# Altium PCB GuitarPedal.PcbDoc
Units mm, origin at the board's own origin, x right, y up, seen from the top; angles counter-clockwise.
Board outline 100 x 160 mm, 2 copper layers (Top Layer, Bottom Layer), stack 1.671 mm thick; 45 components, 38 nets, 193 pads, 5 vias.
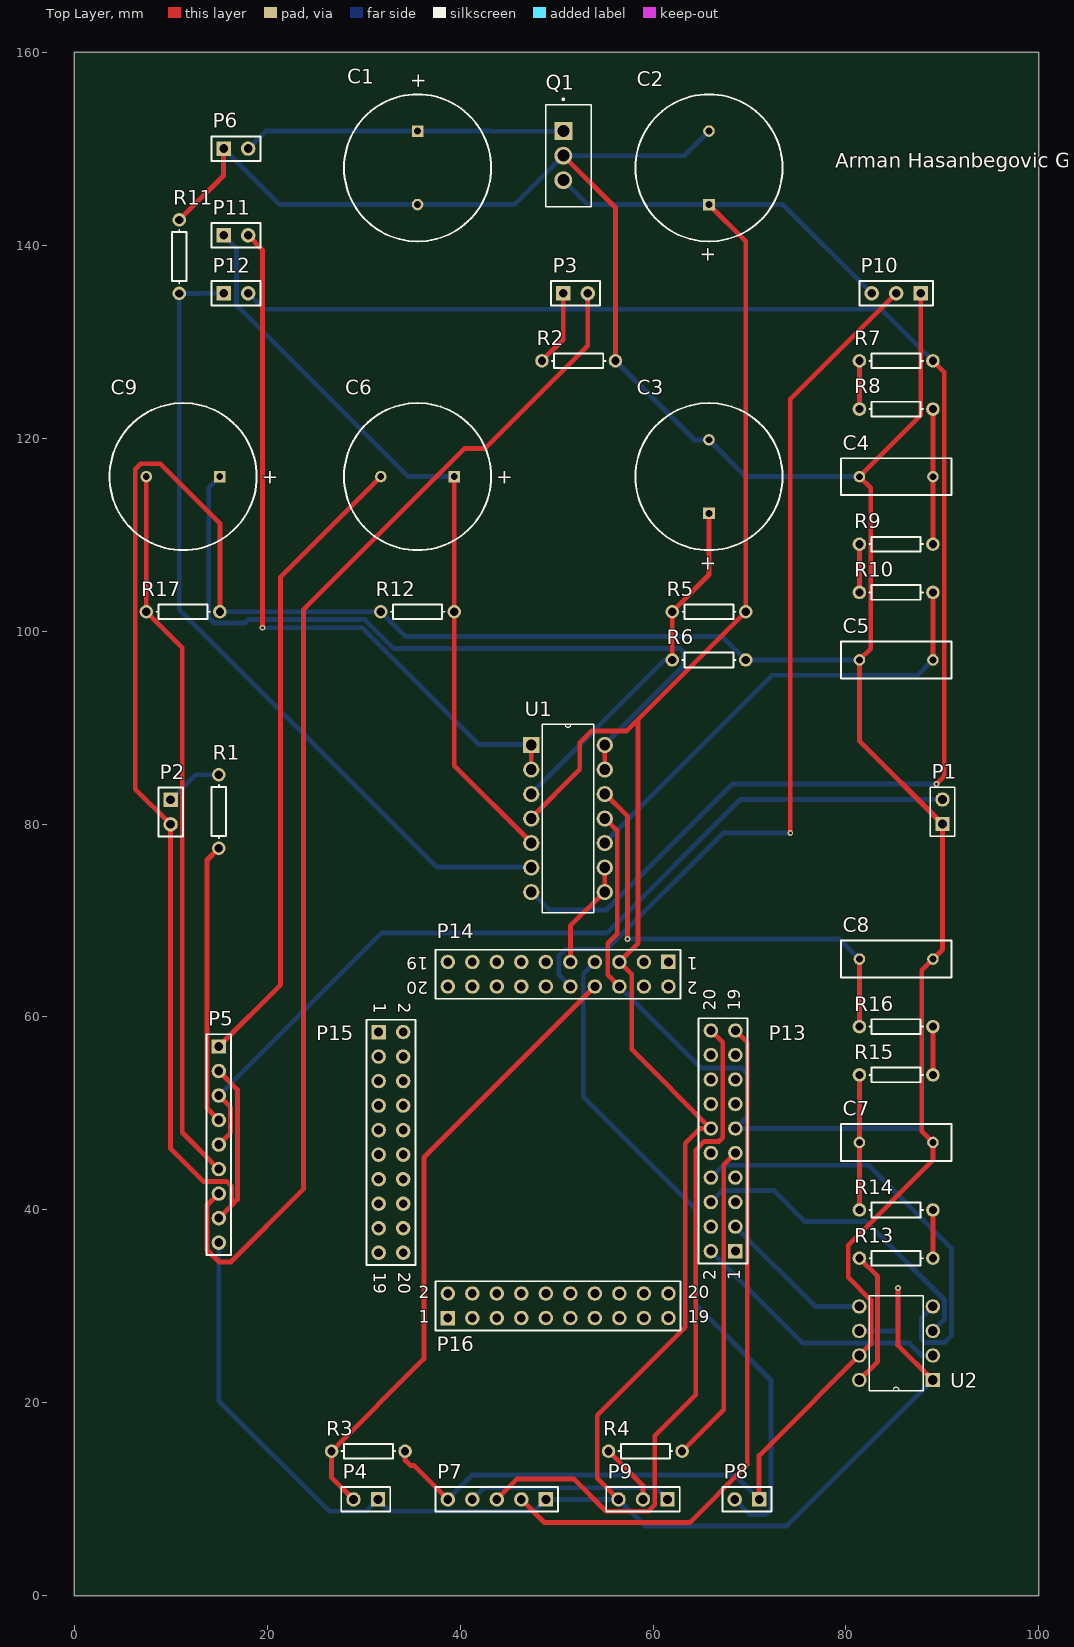
[diagram p0: Top Layer view]
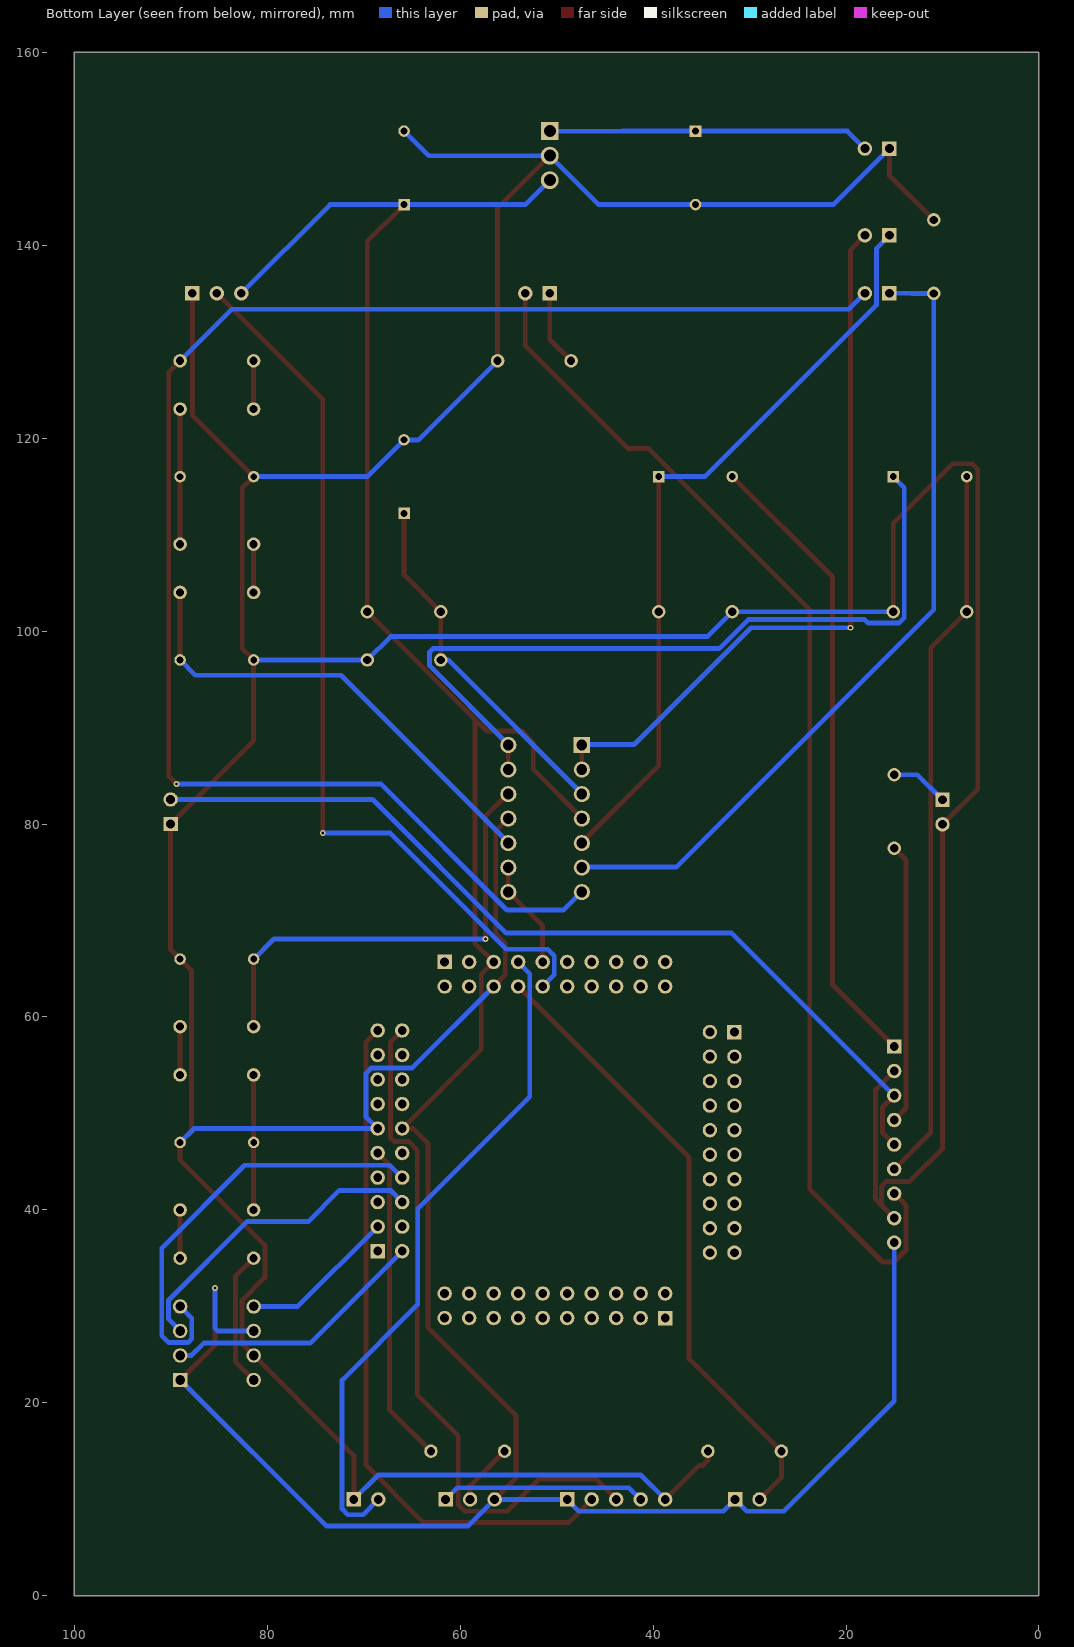
[diagram p1: Bottom Layer view, seen from below]

## Layer stack, top to bottom
Top Solder: solder mask 0.0102, Solder Resist, Dk 3.5
Top Layer: signal copper 0.0356
Dielectric 1: dielectric 1.6, FR-4, Dk 4.8
Bottom Layer: signal copper 0.0356
Bottom Solder: solder mask 0.0102, Solder Resist, Dk 3.5

## Board outline
0,0 100,0 100,160 0,160

## Design rules (kind name [scope] priority, off if disabled: settings)
Clearance [All] p1: gap=0.2 ignorepadtopadclearanceinfootprint=TRUE
PolygonConnect [All] p1: connectstyle=Relief reliefconductorwidth=0.254 reliefentries=4 polygonreliefangle="90 Angle" airgapwidth=0.254
RoutingVias [All] p1: holewidth=0.3 width=0.6 viastyle="Through Hole" minholewidth=0.3 minwidth=0.6 maxholewidth=0.3 maxwidth=0.6
SilkToSolderMaskClearance [IsPad] p1: minsilkscreentomaskgap=0.1 clearancetoexposedcopper=TRUE
SolderMaskExpansion [All] p1: expansion=0.102
Width [All] p1: maxlimit=1 minlimit=0.3 preferedwidth=0.5
29 further rules are at their usual default settings.

## Components (designator, comment, footprint, x,y, rotation, side; value= is the part's Value field where it differs from the comment)
C1 "Cap Pol1" RB7.6-15 35.6,148 r90 top value=100uF
C2 "Cap Pol1" RB7.6-15 65.8,148 r270 top value=100uF
C3 "Cap Pol1" RB7.6-15 65.8,116 r270 top value=47uF
C4 "Cap" RAD-0.3 85.2,116 r0 top value=10nF
C5 "Cap" RAD-0.3 85.2,97 r0 top value=1nF
C6 "Cap Pol1" RB7.6-15 35.6,116 r0 top value=10uF
C7 "Cap" RAD-0.3 85.2,47 r180 top value=1nF
C8 "Cap" RAD-0.3 85.2,66 r180 top value=1nF
C9 "Cap Pol1" RB7.6-15 11.3,116 r0 top value=10uF
P1 "IN-PORT" HDR1X2 90,80 r90 top
P2 "OUT-PORT" HDR1X2 10,82.5 r270 top
P3 "LED-PORT" HDR1X2 50.7,135 r0 top
P4 "2PDT-PORT" HDR1X2 31.5,10 r180 top
P5 "3PDT-PORT" HDR1X9 15,56.94 r270 top
P6 "VOLT-PORT" HDR1X2 15.5,150 r0 top
P7 "PROG-PORT" HDR1X5 48.9,10 r180 top
P8 "RB8-PORT" HDR1X2 71,10 r180 top
P9 "MCLR-PORT" HDR1X3 61.5,10 r180 top
P10 "AN11-PORT" HDR1X3 87.74,135 r180 top
P11 "STEREO-PORT1" HDR1X2 15.5,141 r0 top
P12 "STEREO-PORT2" HDR1X2 15.5,135 r0 top
P13 "DSPIC-1-20" HDR2X10 68.54,35.74 r90 top
P14 "DSPIC-21-40" HDR2X10 61.6,65.7 r180 top
P15 "DSPIC-41-60" HDR2X10 31.56,58.44 r270 top
P16 "DSPIC-61-80" HDR2X10 38.74,28.8 r0 top
Q1 "LM7805CT/NOPB" *TO254P1054X470X2600-3 50.7,151.8 r270 top
R1 "Res1" AXIAL-0.3 15,81.3 r90 top value=100R
R2 "Res1" AXIAL-0.3 52.3,128 r180 top value=390R
R3 "Res1" AXIAL-0.3 30.5,15 r180 top value=10K
R4 "Res1" AXIAL-0.3 59.2,15 r0 top value=10K
R5 "Res1" AXIAL-0.3 65.8,102 r0 top value=470K
R6 "Res1" AXIAL-0.3 65.8,97 r180 top value=470K
R7 "Res1" AXIAL-0.3 85.2,128 r180 top value=1.5K
R8 "Res1" AXIAL-0.3 85.2,123 r0 top value=1.5K
R9 "Res1" AXIAL-0.3 85.2,109 r180 top value=15K
R10 "Res1" AXIAL-0.3 85.2,104 r0 top value=15K
R11 "Res1" AXIAL-0.3 10.9,138.8 r270 top value=100K
R12 "Res1" AXIAL-0.3 35.6,102 r0 top value=100K
R13 "Res1" AXIAL-0.3 85.2,35 r0 top value=100K
R14 "Res1" AXIAL-0.3 85.2,40 r180 top value=15K
R15 "Res1" AXIAL-0.3 85.2,54 r0 top value=100K
R16 "Res1" AXIAL-0.3 85.2,59 r180 top value=15K
R17 "Res1" AXIAL-0.3 11.3,102 r180 top value=100K
U1 "LM324N" *DIP254P762X508-14 47.38,88.18 r0 top
U2 "MCP4921-E/P" *DIP254P762X432-8 89,22.38 r180 top

## Footprints (in the part's own frame and the unit in brackets; to place one, negate y for a bottom-side part, rotate by r counter-clockwise, add the part's x,y. Pads: shape width x height; smd on the part's side, far side on the other; paste and mask are expansions set on the pad)
*DIP254P762X432-8 [mil]
  rect 59x59 hole 39: 1(0,0)
  round 59 hole 39: 2(0,-100) 3(0,-200) 4(0,-300) 5(300,-300) 6(300,-200) 7(300,-100) 8(300,0)
  silkscreen extent 40,-343 260,43
*DIP254P762X508-14 [mil]
  rect 66x66 hole 44: 1(0,0)
  round 66 hole 44: 2(0,-100) 3(0,-200) 4(0,-300) 5(0,-400) 6(0,-500) 7(0,-600) 8(300,-600) 9(300,-500) 10(300,-400) 11(300,-300) 12(300,-200) 13(300,-100) 14(300,0)
  silkscreen extent 45,-685 255,85
*TO254P1054X470X2600-3 [mm]
  rect 1.86x1.86 hole 1.24: 1(0,0)
  round 1.86 hole 1.24: 2(2.54,0) 3(5.08,0)
  silkscreen extent -3.41,-1.8 7.81,2.9
AXIAL-0.3 [mm] "Axial Device, Thru-Hole; 2 Leads; 0.3 in Pin Spacing"
  round 1.4 hole 0.85: 1(-3.81,0) 2(3.81,0)
  silkscreen extent -2.77,-0.76 2.77,0.76
HDR1X2 [mm] "Connector; Header; 2 Position"
  rect 1.5x1.5 hole 0.9: 1(0,0)
  round 1.5 hole 0.9: 2(2.54,0)
  silkscreen extent -1.27,-1.27 3.81,1.27
HDR1X3 [mm] "Connector; Header; 3 Position"
  rect 1.5x1.5 hole 0.9: 1(0,0)
  round 1.5 hole 0.9: 2(2.54,0) 3(5.08,0)
  silkscreen extent -1.27,-1.27 6.35,1.27
HDR1X5 [mm] "Connector; Header; 5 Position"
  rect 1.5x1.5 hole 0.9: 1(0,0)
  round 1.5 hole 0.9: 2(2.54,0) 3(5.08,0) 4(7.62,0) 5(10.16,0)
  silkscreen extent -1.27,-1.27 11.43,1.27
HDR1X9 [mm] "Connector; Header; 9 Position"
  rect 1.5x1.5 hole 0.9: 1(0,0)
  round 1.5 hole 0.9: 2(2.54,0) 3(5.08,0) 4(7.62,0) 5(10.16,0) 6(12.7,0) 7(15.24,0) 8(17.78,0) 9(20.32,0)
  silkscreen extent -1.27,-1.27 21.59,1.27
HDR2X10 [mm] "Connector; Header; 10x2 Position"
  rect 1.5x1.5 hole 0.9: 1(0,0)
  round 1.5 hole 0.9: 2(0,2.54) 3(2.54,0) 4(2.54,2.54) 5(5.08,0) 6(5.08,2.54) 7(7.62,0) 8(7.62,2.54) 9(10.16,0) 10(10.16,2.54) 11(12.7,0) 12(12.7,2.54) 13(15.24,0) 14(15.24,2.54) 15(17.78,0) 16(17.78,2.54) 17(20.32,0) 18(20.32,2.54) 19(22.86,0) 20(22.86,2.54)
  silkscreen extent -1.27,-1.27 24.13,3.81
RAD-0.3 [mm] "Radial Cap, Thru-Hole; 2 Leads; 0.3 in Pin Spacing"
  round 1.2 hole 0.7: 1(-3.81,0) 2(3.81,0)
  silkscreen extent -5.72,-1.91 5.71,1.9
RB7.6-15 [mm] "Polarized Capacitor (Radial); 2 Leads"
  rect 1.2x1.2 hole 0.7: 1(3.81,0)
  round 1.2 hole 0.7: 2(-3.81,0)
  silkscreen extent -7.62,-7.62 7.62,7.62

## Part data
C1 C2 C3 C6 C9: "Polarized Capacitor (Radial)", LatestRevisionDate=17-Jul-2002, LatestRevisionNote="Re-released for DXP Platform.", PackageDescription="Polarized Capacitor (Radial); 2 Leads", PackageReference=RB7.6-15, Published=8-Jun-2000, Publisher="Altium Limited"
C4 C5 C7 C8: "Capacitor", LatestRevisionDate=17-Jul-2002, LatestRevisionNote="Re-released for DXP Platform.", PackageDescription="Radial Cap, Thru-Hole; 2 Leads; 0.3 in Pin Spacing", PackageReference=RAD-0.3, Published=8-Jun-2000, Publisher="Altium Limited"
P1 P2 P3 P4 P6 P8 P11 P12: library part "Header 2", "Header, 2-Pin", LatestRevisionDate=17-Jul-2002, LatestRevisionNote="Re-released for DXP Platform.", Publisher="Altium Limited"
P5: library part "Header 9", "Header, 9-Pin", LatestRevisionDate=17-Jul-2002, LatestRevisionNote="Re-released for DXP Platform.", Publisher="Altium Limited"
P7: library part "Header 5", "Header, 5-Pin", LatestRevisionDate=17-Jul-2002, LatestRevisionNote="Re-released for DXP Platform.", Publisher="Altium Limited"
P9 P10: library part "Header 3", "Header, 3-Pin", LatestRevisionDate=17-Jul-2002, LatestRevisionNote="Re-released for DXP Platform.", Publisher="Altium Limited"
P13 P14 P15 P16: library part "Header 10X2", "Header, 10-Pin, Dual row", LatestRevisionDate=17-Jul-2002, LatestRevisionNote="Re-released for DXP Platform.", Publisher="Altium Limited"
Q1: "IC REG LINEAR 5V 1A TO220AB", Package="TO-220 ON Semiconductor", Availability=Unavailable, MF="ON Semiconductor", MP=LM7805CT, Price=None, SnapEDA_Link=https://www.snapeda.com/parts/LM7805CT/ON%20Semiconductor/view-part/?ref=snap
R1 R2 R3 R4 R5 R6 R7 R8 R9 R10 R11 R12 R13 R14 R15 R16 R17: "Resistor", LatestRevisionDate=17-Jul-2002, LatestRevisionNote="Re-released for DXP Platform.", PackageDescription="Axial Device, Thru-Hole; 2 Leads; 0.3 in Pin Spacing", PackageReference=AXIAL-0.3, Published=8-Jun-2000, Publisher="Altium Limited"
U1: "Ic Opamp Gp 1.2mhz 14dip", Package="PDIP-14 Motorola", Availability=Unavailable, MF=STMicroelectronics, MP=LM324N, Price=None, SnapEDA_Link=https://www.snapeda.com/parts/LM324N/STMicroelectronics/view-part/?ref=snap
U2: "MCP4921 Series 1 Ch 12-Bit Voltage Output Digital-to-Analog Converter-PDIP-8", Package="DIP-8 Microchip", Digi-Key_Part_Number=MCP4921-E/P-ND, Digi-Key_Purchase_URL=https://www.digikey.ba/product-detail/en/microchip-technology/MCP4921-E-P/MCP4921-E-P-ND/716280?utm_source=snapeda&utm_medium=aggregator&utm_campaign=symbol, MF=Microchip, MP=MCP4921-E/P, SnapEDA_Link=https://www.snapeda.com/parts/MCP4921-E/P/Microchip/view-part/?ref=snap

## Via types
v1: diameter 0.6, hole 0.3, Top Layer to Bottom Layer, 5 vias

## Nets (pads, with @x,y where several pads share a name; then routed paths per layer and width w, separated by ;. In a path a pad name is that pad's centre, name@x,y a point inside that pad or via, vN(x,y) a via of type N, cw(c..) or ccw(c..) an arc to the next point about the centre after c; other vN are vias at no path point)
2.5V: P11.2 U1.1 U1.2 | length 76.7
  Top Layer w0.5: P11.2 19.52,139.52 v1(19.52,100.343) ; U1.2@47.38,85.7 U1.1@47.38,88.24
  Bottom Layer w0.5: v1(19.52,100.343) 29.846,100.343 41.949,88.24 U1.1@47.38,88.24
5V: C2.1 P4.1 P5.9 P7.1 P9.3 P10.3 P13.12 P14.5 Q1.3 R5.2 U1.4 U2.1 U2.6 | length 328.8
  Top Layer w0.5: U1.4@47.38,80.62 52.413,85.653 52.413,88.43 53.632,89.649 57.259,89.649 58.458,90.848 ; P9.3 54.216,12.204 54.216,18.732 63.335,27.851 63.335,46.916 64.859,48.44 P13.12 57.798,56.642 57.798,64.422 P14.5 58.458,67.638 58.458,90.848 ; C2.1 69.61,140.38 R5.2 58.458,90.848 ; v1(85.4,31.9) 85.4,26.118 85.331,26.049 U2.1
  Bottom Layer w0.5: P5.9 15,20.204 26.429,8.776 30.276,8.776 P4.1 32.724,8.776 47.676,8.776 P7.1 P9.3 59.168,7.252 73.872,7.252 U2.1 ; Q1.3 53.23,144.19 C2.1 73.47,144.19 P10.3 ; U2.6 85.087,27.46 85.4,27.773 v1(85.4,31.9)
+IN_A: C3.1 R5.1 R6.2 U1.3 | length 37.1
  Top Layer w0.5: R6.2 R5.1 65.8,105.81 C3.1
  Bottom Layer w0.5: U1.3@47.38,83.16 61.22,97 R6.2
+IN_B: C6.1 P11.1 R12.2 U1.5 | length 78.9
  Top Layer w0.5: C6.1 39.41,108.979 R12.2 39.41,86.05 U1.5@47.38,78.08
  Bottom Layer w0.5: P11.1 16.827,139.673 16.827,133.794 34.622,116 C6.1
+IN_C: C5.2 R10.2 U1.10 | length 48.8
  Top Layer w0.5: C5.2 R10.2
  Bottom Layer w0.5: U1.10@55,78.08 72.335,95.415 87.425,95.415 C5.2
+IN_D: C8.2 R16.2 U1.12 | length 47.9
  Top Layer w0.5: U1.12@55,83.16 57.366,80.794 v1(57.366,68.085) ; R16.2 81.39,62.497 C8.2
  Bottom Layer w0.5: v1(57.366,68.085) 79.305,68.085 C8.2
-IN_B: P12.1 R11.2 U1.6 | length 84.9
  Bottom Layer w0.5: P12.1 13.18,135 13.17,134.99 R11.2 10.9,102.226 37.586,75.54 U1.6@47.38,75.54
AN11: P10.2 P14.10 | length 93.4
  Top Layer w0.5: v1(74.231,79.057) 74.231,124.031 P10.2
  Bottom Layer w0.5: P14.10 50.228,64.372 50.228,66.332 50.914,67.018 55.214,67.018 67.254,79.057 v1(74.231,79.057)
GND: C1.2 C2.2 C3.2 C4.1 C5.1 C7.1 C8.1 P1.1 P2.2 P5.2 P5.8 P6.1 P7.5 P8.1 P10.1 P13.11 P14.6 Q1.2 R2.1 R3.1 R6.1 R11.1 R12.1 R17.1 U1.11 U2.7 | length 554.2
  Top Layer w0.5: R11.1 15.5,147.21 P6.1 ; P5.8 16.319,40.479 ; P5.2 16.929,52.471 16.929,41.089 16.319,40.479 ; R17.1 15.11,111.153 8.928,117.335 6.896,117.335 6.337,116.776 6.337,83.623 P2.2 10,46.362 13.398,42.964 15.811,42.964 16.319,42.456 16.319,40.479 ; R3.1 34.31,14.051 34.836,13.525 35.215,13.525 P7.5 ; Q1.2 56.11,143.85 R2.1 ; U1.11@55,80.62 56.299,79.321 56.299,68.618 55.308,67.627 55.308,64.372 P14.6 ; P8.1 71,14.54 82.579,26.119 82.579,30.654 80.226,33.007 80.226,36.36 89.01,45.144 C7.1 87.846,48.164 87.846,64.836 C8.1 90,66.99 P1.1 81.39,88.61 C5.1 82.563,98.173 82.563,114.827 C4.1 87.74,122.35 P10.1
  Bottom Layer w0.5: R17.1 R12.1 34.362,99.428 67.182,99.428 R6.1 C5.1 ; P6.1 21.31,144.19 C1.2 45.63,144.19 Q1.2 63.25,149.26 C2.2 ; P7.5 41.275,12.535 68.465,12.535 P8.1 ; R2.1 64.3,119.81 C3.2 69.61,116 C4.1 ; P14.6 64.956,54.724 69.177,54.724 69.761,54.14 69.761,49.661 P13.11 87.57,48.44 C7.1
LED: P3.2 P5.7 | length 126.3
  Top Layer w0.5: P5.7 13.779,40.479 13.779,35.852 15.024,34.607 16.218,34.607 23.762,42.151 23.762,102.222 40.449,118.91 42.583,118.91 53.24,129.567 P3.2
MCLR: P13.9 R4.2 | length 33.2
  Top Layer w0.5: R4.2 67.323,19.313 67.323,44.683 P13.9
MCLR_PROG: P7.4 P9.1 | length 21.2
  Bottom Layer w0.5: P7.4 42.494,11.214 60.286,11.214 P9.1
NetC4_2: C4.2 R8.2 R9.1 | length 14
  Top Layer w0.5: R9.1 C4.2 R8.2
NetC7_2: C7.2 R14.2 R15.1 | length 14
  Top Layer w0.5: R14.2 81.39,43.497 C7.2 81.39,50.482 R15.1
NetP2_1: P2.1 R1.2 | length 6.1
  Bottom Layer w0.5: P2.1 12.61,85.11 R1.2
NetP3_1: P3.1 R2.2 | length 7.9
  Top Layer w0.5: R2.2 50.7,130.21 P3.1
NetP9_2: P9.2 R4.1 | length 6.5
  Top Layer w0.5: R4.1 58.96,11.43 P9.2
NetR7_2: R7.2 R8.1 | length 5
  Top Layer w0.5: R8.1 R7.2
NetR9_2: R9.2 R10.1 | length 5
  Top Layer w0.5: R10.1 R9.2
NetR13_2: R13.2 R14.1 | length 5
  Top Layer w0.5: R13.2 R14.1
NetR15_2: R15.2 R16.1 | length 5
  Top Layer w0.5: R15.2 R16.1
OUTB: P12.2 R7.1 U1.7 | length 166.7
  Top Layer w0.5: R7.1 90.183,126.827 90.183,84.95 v1(89.37,84.137)
  Bottom Layer w0.5: P12.2 19.703,133.337 83.673,133.337 R7.1 ; U1.7@47.38,73 49.298,71.082 55.131,71.082 68.186,84.137 v1(89.37,84.137)
OUTD: C9.1 U1.13 U1.14 | length 81.6
  Top Layer w0.5: U1.13@55,85.7 U1.14@55,88.24
  Bottom Layer w0.5: C9.1 13.957,114.847 13.957,101.384 14.516,100.825 17.716,100.825 18.072,101.181 30.137,101.181 33.134,98.184 62.801,98.184 63.157,97.828 63.157,96.397 U1.14@55,88.24
PGC: P7.2 P13.19 | length 72.4
  Top Layer w0.5: P7.2 48.753,7.607 63.792,7.607 69.761,13.576 69.761,57.379 P13.19
PGD: P7.3 P13.20 | length 72.4
  Top Layer w0.5: P7.3 45.948,12.128 51.778,12.128 55.131,8.776 59.525,8.776 60.185,9.436 60.185,16.599 64.427,20.841 64.427,46.211 65.316,47.1 66.84,47.1 67.221,47.481 67.221,57.379 P13.20
RB8: P8.2 P14.7 | length 69.9
  Bottom Layer w0.5: P14.7 52.768,64.488 52.768,51.752 64.376,40.145 64.376,30.213 72.225,22.365 72.225,9.019 71.626,8.42 70.04,8.42 P8.2
RB9: P4.2 P14.8 R3.2 | length 65.4
  Top Layer w0.5: P4.2 26.69,12.27 R3.2 36.258,24.568 36.258,45.438 P14.8
RC1: P13.2 U2.2 | length 27.5
  Bottom Layer w0.5: P13.2 75.54,26.2 86.565,26.2 87.845,24.92 U2.2
RC2: P13.3 U2.5 | length 16.3
  Bottom Layer w0.5: P13.3 76.82,30 U2.5
RG6: P13.6 U2.3 | length 33.1
  Bottom Layer w0.5: P13.6 67.204,42.024 72.511,42.024 75.746,38.789 82.09,38.789 90.208,30.67 90.208,28.668 U2.3
RG8: P13.8 U2.4 | length 45.5
  Bottom Layer w0.5: P13.8 67.28,44.64 82.334,44.64 90.919,36.055 90.919,26.962 90.208,26.251 88.176,26.251 87.795,26.632 87.795,28.795 U2.4
VADC: P14.9 U1.8 U1.9 | length 11.3
  Top Layer w0.5: P14.9 51.44,69.44 55,73 U1.9@55,75.54
VDAC: R13.1 U2.8 | length 14.2
  Top Layer w0.5: U2.8 83.279,24.279 83.279,33.111 R13.1
VDDIN: C1.1 P6.2 Q1.1 | length 33.4
  Bottom Layer w0.5: P6.2 19.85,151.81 C1.1 43.142,151.81 43.152,151.8 Q1.1
Veffect_IN: C6.2 P5.1 | length 66
  Top Layer w0.5: P5.1 21.399,63.339 21.399,105.609 C6.2
Veffect_OUT: C9.2 P5.6 R17.2 | length 74.9
  Top Layer w0.5: C9.2 R17.2 11.214,98.276 11.214,48.026 P5.6
VIN: P1.2 P5.3 P5.5 | length 93.8
  Top Layer w0.5: P5.5 16.218,47.998 16.218,50.642 P5.3
  Bottom Layer w0.5: P5.3 31.834,68.694 55.207,68.694 69.053,82.54 P1.2
VOUT: P5.4 R1.1 | length 29.2
  Top Layer w0.5: P5.4 13.779,50.541 13.779,76.269 R1.1
pads on no net: P13.1 P13.4 P13.5 P13.7 P13.10 P13.13 P13.14 P13.15 P13.16 P13.17 P13.18 P14.1 P14.2 P14.3 P14.4 P14.11 P14.12 P14.13 P14.14 P14.15 P14.16 P14.17 P14.18 P14.19 P14.20 P15.1 P15.2 P15.3 P15.4 P15.5 P15.6 P15.7 P15.8 P15.9 P15.10 P15.11 P15.12 P15.13 P15.14 P15.15 P15.16 P15.17 P15.18 P15.19 P15.20 P16.1 P16.2 P16.3 P16.4 P16.5 P16.6 P16.7 P16.8 P16.9 P16.10 P16.11 P16.12 P16.13 P16.14 P16.15 P16.16 P16.17 P16.18 P16.19 P16.20

## Silkscreen, mask and mechanical layers (free items; w line width, h text height)
Top Overlay:
  text "Arman Hasanbegovic Guitar Pedal 2019" at 78.9,148 h1.52
Board Outline:
  the board outline again, w0.254

## Text inside footprints (layer, text, board x,y; h text height)
C1: Top Overlay "+" at 36.337,156.132 h1.5 r90
C2: Top Overlay "+" at 65.063,139.868 h1.5 r270
C3: Top Overlay "+" at 65.063,107.868 h1.5 r270
C6: Top Overlay "+" at 43.732,115.263 h1.5
C9: Top Overlay "+" at 19.432,115.263 h1.5
P13: Top Overlay "2" at 66.508,32.7 h1.27 r90; Top Overlay "1" at 69.048,32.7 h1.27 r90; Top Overlay "19" at 69.048,60.624 h1.27 r90; Top Overlay "20" at 66.508,60.624 h1.27 r90
P14: Top Overlay "2" at 64.64,63.668 h1.27 r180; Top Overlay "1" at 64.64,66.208 h1.27 r180; Top Overlay "19" at 36.716,66.208 h1.27 r180; Top Overlay "20" at 36.716,63.668 h1.27 r180
P15: Top Overlay "2" at 33.592,61.48 h1.27 r270; Top Overlay "1" at 31.052,61.48 h1.27 r270; Top Overlay "19" at 31.052,33.556 h1.27 r270; Top Overlay "20" at 33.592,33.556 h1.27 r270
P16: Top Overlay "2" at 35.7,30.832 h1.27; Top Overlay "1" at 35.7,28.292 h1.27; Top Overlay "19" at 63.624,28.292 h1.27; Top Overlay "20" at 63.624,30.832 h1.27